# Altium PCB BatCollector.PcbDoc
Units mil, origin at the board's own origin, x right, y up, seen from the top; angles counter-clockwise.
Board outline 16430 x 2540 mil, 2 copper layers (Top Layer, Bottom Layer); 31 components, 35 nets, 73 pads, 4 vias.
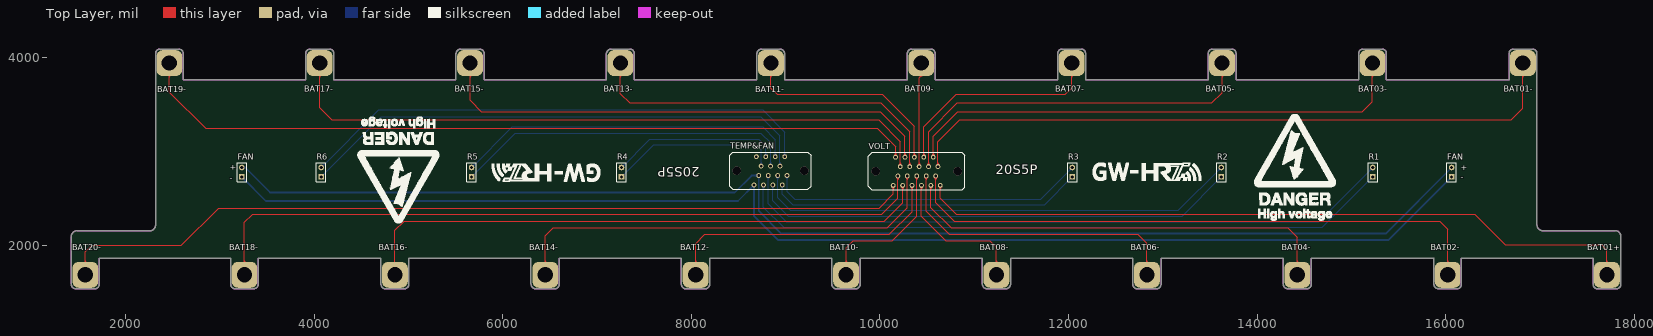
[diagram p0: Top Layer view]
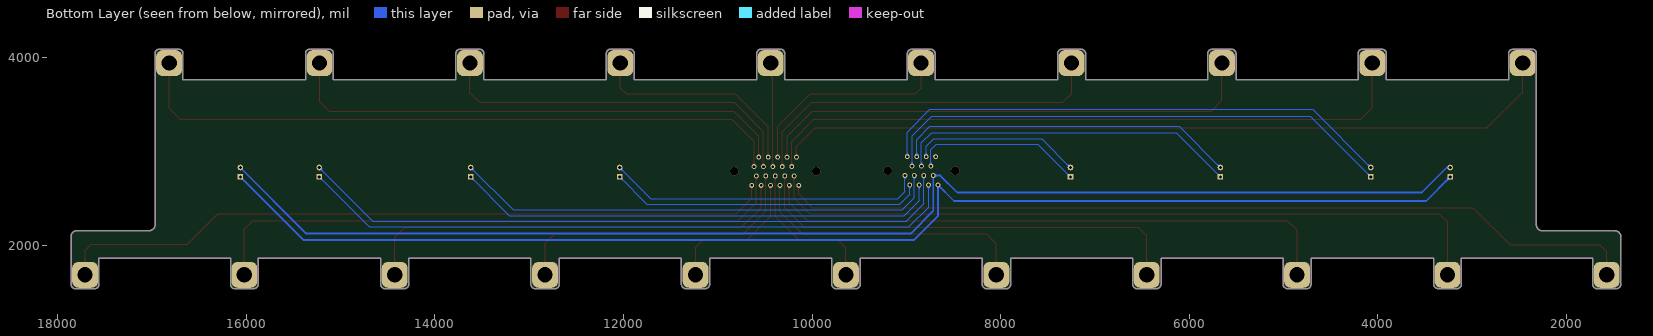
[diagram p1: Bottom Layer view, seen from below]

## Layer stack, top to bottom
Top Solder: solder mask 0.4, Solder Resist, Dk 3.5
Top Layer: signal copper 1.4
Dielectric 1: dielectric 12.6, FR-4, Dk 4.8
Bottom Layer: signal copper 1.4
Bottom Solder: solder mask 0.4, Solder Resist, Dk 3.5

## Board outline
1475,1545 cw(c1475,1595) 1425,1595 1425,2095 cw(c1490,2095) 1490,2160 2260,2160 ccw(c2260,2220) 2320,2220 2320,4040 cw(c2365,4040) 2365,4085 2565,4085 cw(c2565,4035) 2615,4035 2615,3760 3910,3760 3910,4035 cw(c3960,4035) 3960,4085 4165,4085 cw(c4165,4040) 4210,4040 4210,3760 5505,3760 5505,4035 cw(c5555,4035) 5555,4085 5755,4085 cw(c5755,4035) 5805,4035 5805,3760 7100,3760 7100,4035 cw(c7150,4035) 7150,4085 7350,4085 cw(c7350,4040) 7395,4040 7395,3760 8695,3760 8695,4035 cw(c8745,4035) 8745,4085 8940,4085 cw(c8940,4035) 8990,4035 8990,3760 10290,3760 10290,4040 cw(c10335,4040) 10335,4085 10540,4085 cw(c10540,4040) 10585,4040 10585,3760 11885,3760 11885,4040 cw(c11930,4040) 11930,4085 12135,4085 cw(c12135,4040) 12180,4040 12180,3760 13480,3760 13480,4040 cw(c13525,4040) 13525,4085 13730,4085 cw(c13730,4040) 13775,4040 13775,3760 15075,3760 15075,4040 cw(c15120,4040) 15120,4085 15325,4085 cw(c15325,4040) 15370,4040 15370,3760 16670,3760 16670,4040 cw(c16715,4040) 16715,4085 16920,4085 cw(c16920,4040) 16965,4040 16965,2225 ccw(c17030,2225) 17030,2160 17795,2160 cw(c17795,2100) 17855,2100 17855,1590 cw(c17810,1590) 17810,1545 17605,1545 cw(c17605,1590) 17560,1590 17560,1870 16165,1870 16165,1590 cw(c16120,1590) 16120,1545 15920,1545 cw(c15920,1592.5) 15872.5,1592.5 15872.5,1867.5 15870,1870 14575,1870 14575,1595 cw(c14525,1595) 14525,1545 14325,1545 cw(c14325,1595) 14275,1595 14275,1870 12980,1870 12980,1590 cw(c12935,1590) 12935,1545 12725,1545 cw(c12725,1590) 12680,1590 12680,1870 11385,1870 11385,1595 cw(c11335,1595) 11335,1545 11135,1545 cw(c11135,1595) 11085,1595 11085,1870 9790,1870 9790,1590 cw(c9745,1590) 9745,1545 9535,1545 cw(c9535,1590) 9490,1590 9490,1870 8195,1870 8195,1590 cw(c8150,1590) 8150,1545 7940,1545 cw(c7940,1590) 7895,1590 7895,1870 6600,1870 6600,1590 cw(c6555,1590) 6555,1545 6350,1545 cw(c6350,1595) 6300,1595 6300,1870 5005,1870 5005,1590 cw(c4960,1590) 4960,1545 4755,1545 cw(c4755,1590) 4710,1590 4710,1870 3410,1870 3410,1595 cw(c3360,1595) 3360,1545 3165,1545 cw(c3165,1595) 3115,1595 3115,1870 1725,1870 1725,1595 cw(c1675,1595) 1675,1545

## Design rules (kind name [scope] priority, off if disabled: settings)
Clearance [All] p1: gap=1
PolygonConnect [All] p1: connectstyle=Relief reliefconductorwidth=10 reliefentries=4 polygonreliefangle="90 Angle" airgapwidth=10
RoutingVias [All] p1: holewidth=28 width=50 viastyle="Through Hole" minholewidth=28 minwidth=50 maxholewidth=28 maxwidth=50
SolderMaskExpansion [All] p1: expansion=4
Width [All] p1: maxlimit=50 minlimit=10 preferedwidth=10
30 further rules are at their usual default settings.

## Components (designator, comment, footprint, x,y, rotation, side; value= is the part's Value field where it differs from the comment)
BAT01+ "Bigpad" Bigpad 17706.69,1692.91 r0 top (schematic designator J1)
BAT01- "Bigpad" Bigpad 16815.94,3937.01 r0 top (schematic designator J12)
BAT02- "Bigpad" Bigpad 16018.7,1692.91 r0 top (schematic designator J2)
BAT03- "Bigpad" Bigpad 15221.46,3937.01 r0 top (schematic designator J13)
BAT04- "Bigpad" Bigpad 14424.21,1692.91 r0 top (schematic designator J3)
BAT05- "Bigpad" Bigpad 13626.97,3937.01 r0 top (schematic designator J14)
BAT06- "Bigpad" Bigpad 12829.72,1692.91 r0 top (schematic designator J4)
BAT07- "Bigpad" Bigpad 12032.48,3937.01 r0 top (schematic designator J15)
BAT08- "Bigpad" Bigpad 11235.24,1692.91 r0 top (schematic designator J5)
BAT09- "Bigpad" Bigpad 10437.99,3937.01 r0 top (schematic designator J16)
BAT10- "Bigpad" Bigpad 9640.75,1692.91 r0 top (schematic designator J6)
BAT11- "Bigpad" Bigpad 8843.5,3937.01 r0 top (schematic designator J17)
BAT12- "Bigpad" Bigpad 8046.26,1692.91 r0 top (schematic designator J7)
BAT13- "Bigpad" Bigpad 7249.02,3937.01 r0 top (schematic designator J18)
BAT14- "Bigpad" Bigpad 6451.77,1692.91 r0 top (schematic designator J8)
BAT15- "Bigpad" Bigpad 5654.53,3937.01 r0 top (schematic designator J19)
BAT16- "Bigpad" Bigpad 4857.28,1692.91 r0 top (schematic designator J9)
BAT17- "Bigpad" Bigpad 4060.04,3937.01 r0 top (schematic designator J20)
BAT18- "Bigpad" Bigpad 3262.8,1692.91 r0 top (schematic designator J10)
BAT19- "Bigpad" Bigpad 2465.55,3937.01 r0 top (schematic designator J21)
BAT20- "Bigpad" Bigpad 1574.8,1692.91 r0 top (schematic designator J11)
FAN "Header 2" HDR1X2 16060,2730 r90 top (schematic designator P2)
FAN "Header 2" HDR1X2 3235,2730 r90 top (schematic designator P1)
R1 "Header 2" HDR1X2 15225,2730 r90 top (schematic designator P7)
R2 "Header 2" HDR1X2 13620,2730 r90 top (schematic designator P5)
R3 "Header 2" HDR1X2 12040,2730 r90 top (schematic designator P3)
R4 "Header 2" HDR1X2 7260,2730 r90 top (schematic designator P8)
R5 "Header 2" HDR1X2 5670,2730 r90 top (schematic designator P6)
R6 "Header 2" HDR1X2 4075,2730 r90 top (schematic designator P4)
TEMP&FAN "J30J-15" J30J-15 9015,2745 r0 top (schematic designator J23)
VOLT "J30J-21" J30J-21 10640,2640 r0 top (schematic designator J22)

## Footprints (in the part's own frame and the unit in brackets; to place one, negate y for a bottom-side part, rotate by r counter-clockwise, add the part's x,y. Pads: shape width x height; smd on the part's side, far side on the other; paste and mask are expansions set on the pad)
Bigpad [mm]
  rrect50% 7x7 hole 4.1: 1(0,0)
HDR1X2 [mm] "Connector; Header; 2 Position"
  rect 1.5x1.5 hole 0.9: 1(0,0)
  round 1.5 hole 0.9: 2(2.54,0)
  silkscreen extent -1.27,-1.27 3.81,1.27
J30J-15 [mm]
  round 1.3 hole 0.7: 1(0,0) 2(-1.27,-2.54) 3(-2.54,0) 4(-3.81,-2.54) 5(-5.08,0) 6(-6.35,-2.54) 7(-7.62,0) 8(-8.89,-2.54) 9(-0.635,5.08) 10(-1.905,2.54) 11(-3.175,5.08) 12(-4.445,2.54) 13(-5.715,5.08) 14(-6.985,2.54) 15(-8.255,5.08)
  silkscreen extent -15.44,-3.76 6.5,6.32
J30J-21 [mm]
  round 1.3 hole 0.7: 1(0,0) 2(-1.27,2.54) 3(-2.54,0) 4(-3.81,2.54) 5(-5.08,0) 6(-6.35,2.54) 7(-7.62,0) 8(-8.89,2.54) 9(-10.16,0) 10(-11.43,2.54) 11(-12.7,0) 12(-0.635,5.08) 13(-1.905,7.62) 14(-3.175,5.08) 15(-4.445,7.62) 16(-5.715,5.08) 17(-6.985,7.62) 18(-8.255,5.08) 19(-9.525,7.62) 20(-10.795,5.08) 21(-12.065,7.62)
  silkscreen extent -19.38,-1.17 6.6,8.92

## Part data
FAN FAN R1 R2 R3 R4 R5 R6: "Header, 2-Pin"

## Via types
v1: diameter 90.55, hole 90.55, Top Layer to Bottom Layer, 4 vias

## Nets (pads, with @x,y where several pads share a name; then routed paths per layer and width w, separated by ;. In a path a pad name is that pad's centre, name@x,y a point inside that pad or via, vN(x,y) a via of type N, cw(c..) or ccw(c..) an arc to the next point about the centre after c; other vN are vias at no path point)
BAT01+: BAT01+.1 VOLT.1 | length 7690.6
  Top Layer w10: VOLT.1 10640,2505 10810,2335 16305,2335 16630,2010 17650,2010 17706.69,1953.31 BAT01+.1
BAT01-: BAT01-.1 VOLT.12 | length 7092.4
  Top Layer w10: VOLT.12 10615,3105 10845,3335 16695,3335 16815.94,3455.94 BAT01-.1
BAT02-: BAT02-.1 VOLT.2 | length 6312.5
  Top Layer w10: VOLT.2 10590,2455 10785,2260 15935,2260 16018.7,2176.3 BAT02-.1
BAT03-: BAT03-.1 VOLT.13 | length 5438.8
  Top Layer w10: VOLT.13 10565,3160 10825,3420 15115,3420 15221.46,3526.46 BAT03-.1
BAT04-: BAT04-.1 VOLT.3 | length 4647.2
  Top Layer w10: VOLT.3 10540,2405 10755,2190 14325,2190 14424.21,2090.79 BAT04-.1
BAT05-: BAT05-.1 VOLT.14 | length 3967.7
  Top Layer w10: VOLT.14 10515,3210 10820,3515 13520,3515 13626.97,3621.97 BAT05-.1
BAT06-: BAT06-.1 VOLT.4 | length 3187.8
  Top Layer w10: VOLT.4 10490,2365 10735,2120 12735,2120 12829.72,2025.28 BAT06-.1
BAT07-: BAT07-.1 VOLT.15 | length 2322.9
  Top Layer w10: VOLT.15 10465,3260 10810,3605 11965,3605 12032.48,3672.48 BAT07-.1
BAT08-: BAT08-.1 VOLT.5 | length 1548.9
  Top Layer w10: VOLT.5 10440,2315 10700,2055 11165,2055 11235.24,1984.76 BAT08-.1
BAT09-: BAT09-.1 VOLT.16 | length 1106.5
  Top Layer w10: VOLT.16 10415,3780 10437.99,3802.99 BAT09-.1
BAT10-: BAT10-.1 VOLT.6 | length 1600.5
  Top Layer w10: BAT10-.1 9640.75,1980.75 9715,2055 10130,2055 10390,2315 VOLT.6
BAT11-: BAT11-.1 VOLT.17 | length 2280.4
  Top Layer w10: BAT11-.1 8843.5,3671.5 8910,3605 10025,3605 10365,3265 VOLT.17
BAT12-: BAT12-.1 VOLT.7 | length 3042.4
  Top Layer w10: BAT12-.1 8046.26,2021.26 8145,2120 10100,2120 10340,2360 VOLT.7
BAT13-: BAT13-.1 VOLT.18 | length 3928.1
  Top Layer w10: BAT13-.1 7249.02,3610.98 7345,3515 10010,3515 10315,3210 VOLT.18
BAT14-: BAT14-.1 VOLT.8 | length 4710.6
  Top Layer w10: BAT14-.1 6451.77,2106.77 6535,2190 10075,2190 10290,2405 VOLT.8
BAT15-: BAT15-.1 VOLT.19 | length 5384.6
  Top Layer w10: BAT15-.1 5654.53,3540.47 5775,3420 10005,3420 10265,3160 VOLT.19
BAT16-: BAT16-.1 VOLT.9 | length 6158.3
  Top Layer w10: BAT16-.1 4857.28,2162.28 4955,2260 10045,2260 10240,2455 VOLT.9
BAT17-: BAT17-.1 VOLT.20 | length 7041.1
  Top Layer w10: BAT17-.1 4060.04,3464.96 4190,3335 9985,3335 10215,3105 VOLT.20
BAT18-: BAT18-.1 VOLT.10 | length 7823.6
  Top Layer w10: BAT18-.1 3262.8,2247.8 3350,2335 10020,2335 10190,2505 VOLT.10
BAT19-: BAT19-.1 VOLT.21 | length 8357
  Top Layer w10: BAT19-.1 2465.55,3629.45 2850,3245 9970,3245 10165,3050 VOLT.21
BAT20-: BAT20-.1 VOLT.11 | length 9151.9
  Top Layer w10: BAT20-.1 1574.8,1934.8 1645,2005 2595,2005 2990,2400 9990,2400 10140,2550 VOLT.11
FAN+: FAN.2 TEMP&FAN.7 | length 13773.7
  Bottom Layer w20: FAN.2@3235,2830 3270,2830 3535,2565 8460,2565 8640,2745 TEMP&FAN.7 8715,2370 8955,2130 15360,2130 FAN.2@16060,2830
FAN-: FAN.1 TEMP&FAN.8 | length 13714.2
  Bottom Layer w20: FAN.1@3235,2730 3490,2475 8495,2475 TEMP&FAN.8 8665,2315 8920,2060 15390,2060 FAN.1@16060,2730
RT01: R3.2 TEMP&FAN.1 | length 3366.9
  Bottom Layer w10: TEMP&FAN.1 9015,2575 9095,2495 11705,2495 R3.2
RT01-: R3.1 TEMP&FAN.2 | length 3342.8
  Bottom Layer w10: TEMP&FAN.2 8965,2545 9075,2435 11745,2435 R3.1
RT02: R6.2 TEMP&FAN.9 | length 5525
  Bottom Layer w10: R6.2 4685,3440 8755,3440 8990,3205 TEMP&FAN.9
RT02-: R6.1 TEMP&FAN.10 | length 5535
  Bottom Layer w10: R6.1 4715,3370 8735,3370 8940,3165 TEMP&FAN.10
RT03: R2.2 TEMP&FAN.3 | length 5184.4
  Bottom Layer w10: TEMP&FAN.3 8915,2510 9050,2375 13165,2375 R2.2
RT03-: R2.1 TEMP&FAN.4 | length 5160.2
  Bottom Layer w10: TEMP&FAN.4 8865,2480 9030,2315 13205,2315 R2.1
RT04: R5.2 TEMP&FAN.11 | length 3634
  Bottom Layer w10: R5.2 6100,3260 8755,3260 8890,3125 TEMP&FAN.11
RT04-: R5.1 TEMP&FAN.12 | length 3651.1
  Bottom Layer w10: R5.1 6135,3195 8735,3195 8840,3090 TEMP&FAN.12
RT05: R1.2 TEMP&FAN.5 | length 7026.9
  Bottom Layer w10: TEMP&FAN.5 8815,2445 9005,2255 14650,2255 R1.2
RT05-: R1.1 TEMP&FAN.6 | length 7005.7
  Bottom Layer w10: TEMP&FAN.6 8765,2410 8980,2195 14690,2195 R1.1
RT06: R4.2 TEMP&FAN.13 | length 1795.3
  Bottom Layer w10: R4.2 7560,3130 8715,3130 8790,3055 TEMP&FAN.13
RT06-: R4.1 TEMP&FAN.14 | length 1816.5
  Bottom Layer w10: R4.1 7600,3070 8690,3070 8740,3020 TEMP&FAN.14
pads on no net: TEMP&FAN.15
copper on no net:
  other v1: 9956.93,2790 10823.07,2790 8481.73,2795 9198.27,2795

## Keep-outs
Keep-Out Layer:
  the board outline again, w10

## Silkscreen, mask and mechanical layers (free items; w line width, h text height)
Top Overlay:
  drawing of 14152 lines, arcs and shapes, not listed
  text "20S5P" at 8090,2835 h100 r180
  text "+" at 3105,2805 h60
  text "+" at 16160,2800 h60
  text "20S5P" at 11230,2760 h100
  text "-" at 16160,2695 h60
  text "-" at 3105,2690 h60